# Altium PCB Chronos.PcbDoc (part 4 of 6)
Units mm, origin at the board's own origin, x right, y up, seen from the top; angles counter-clockwise.
Board outline 74.94 x 59.01 mm, 8 copper layers (TOP, L02_GND, L03_SIG, L04_PWR, L05_GND, L06_SIG, L07_GND, BOTTOM), stack 1.624 mm thick; 413 components, 238 nets, 1566 pads, 873 vias.
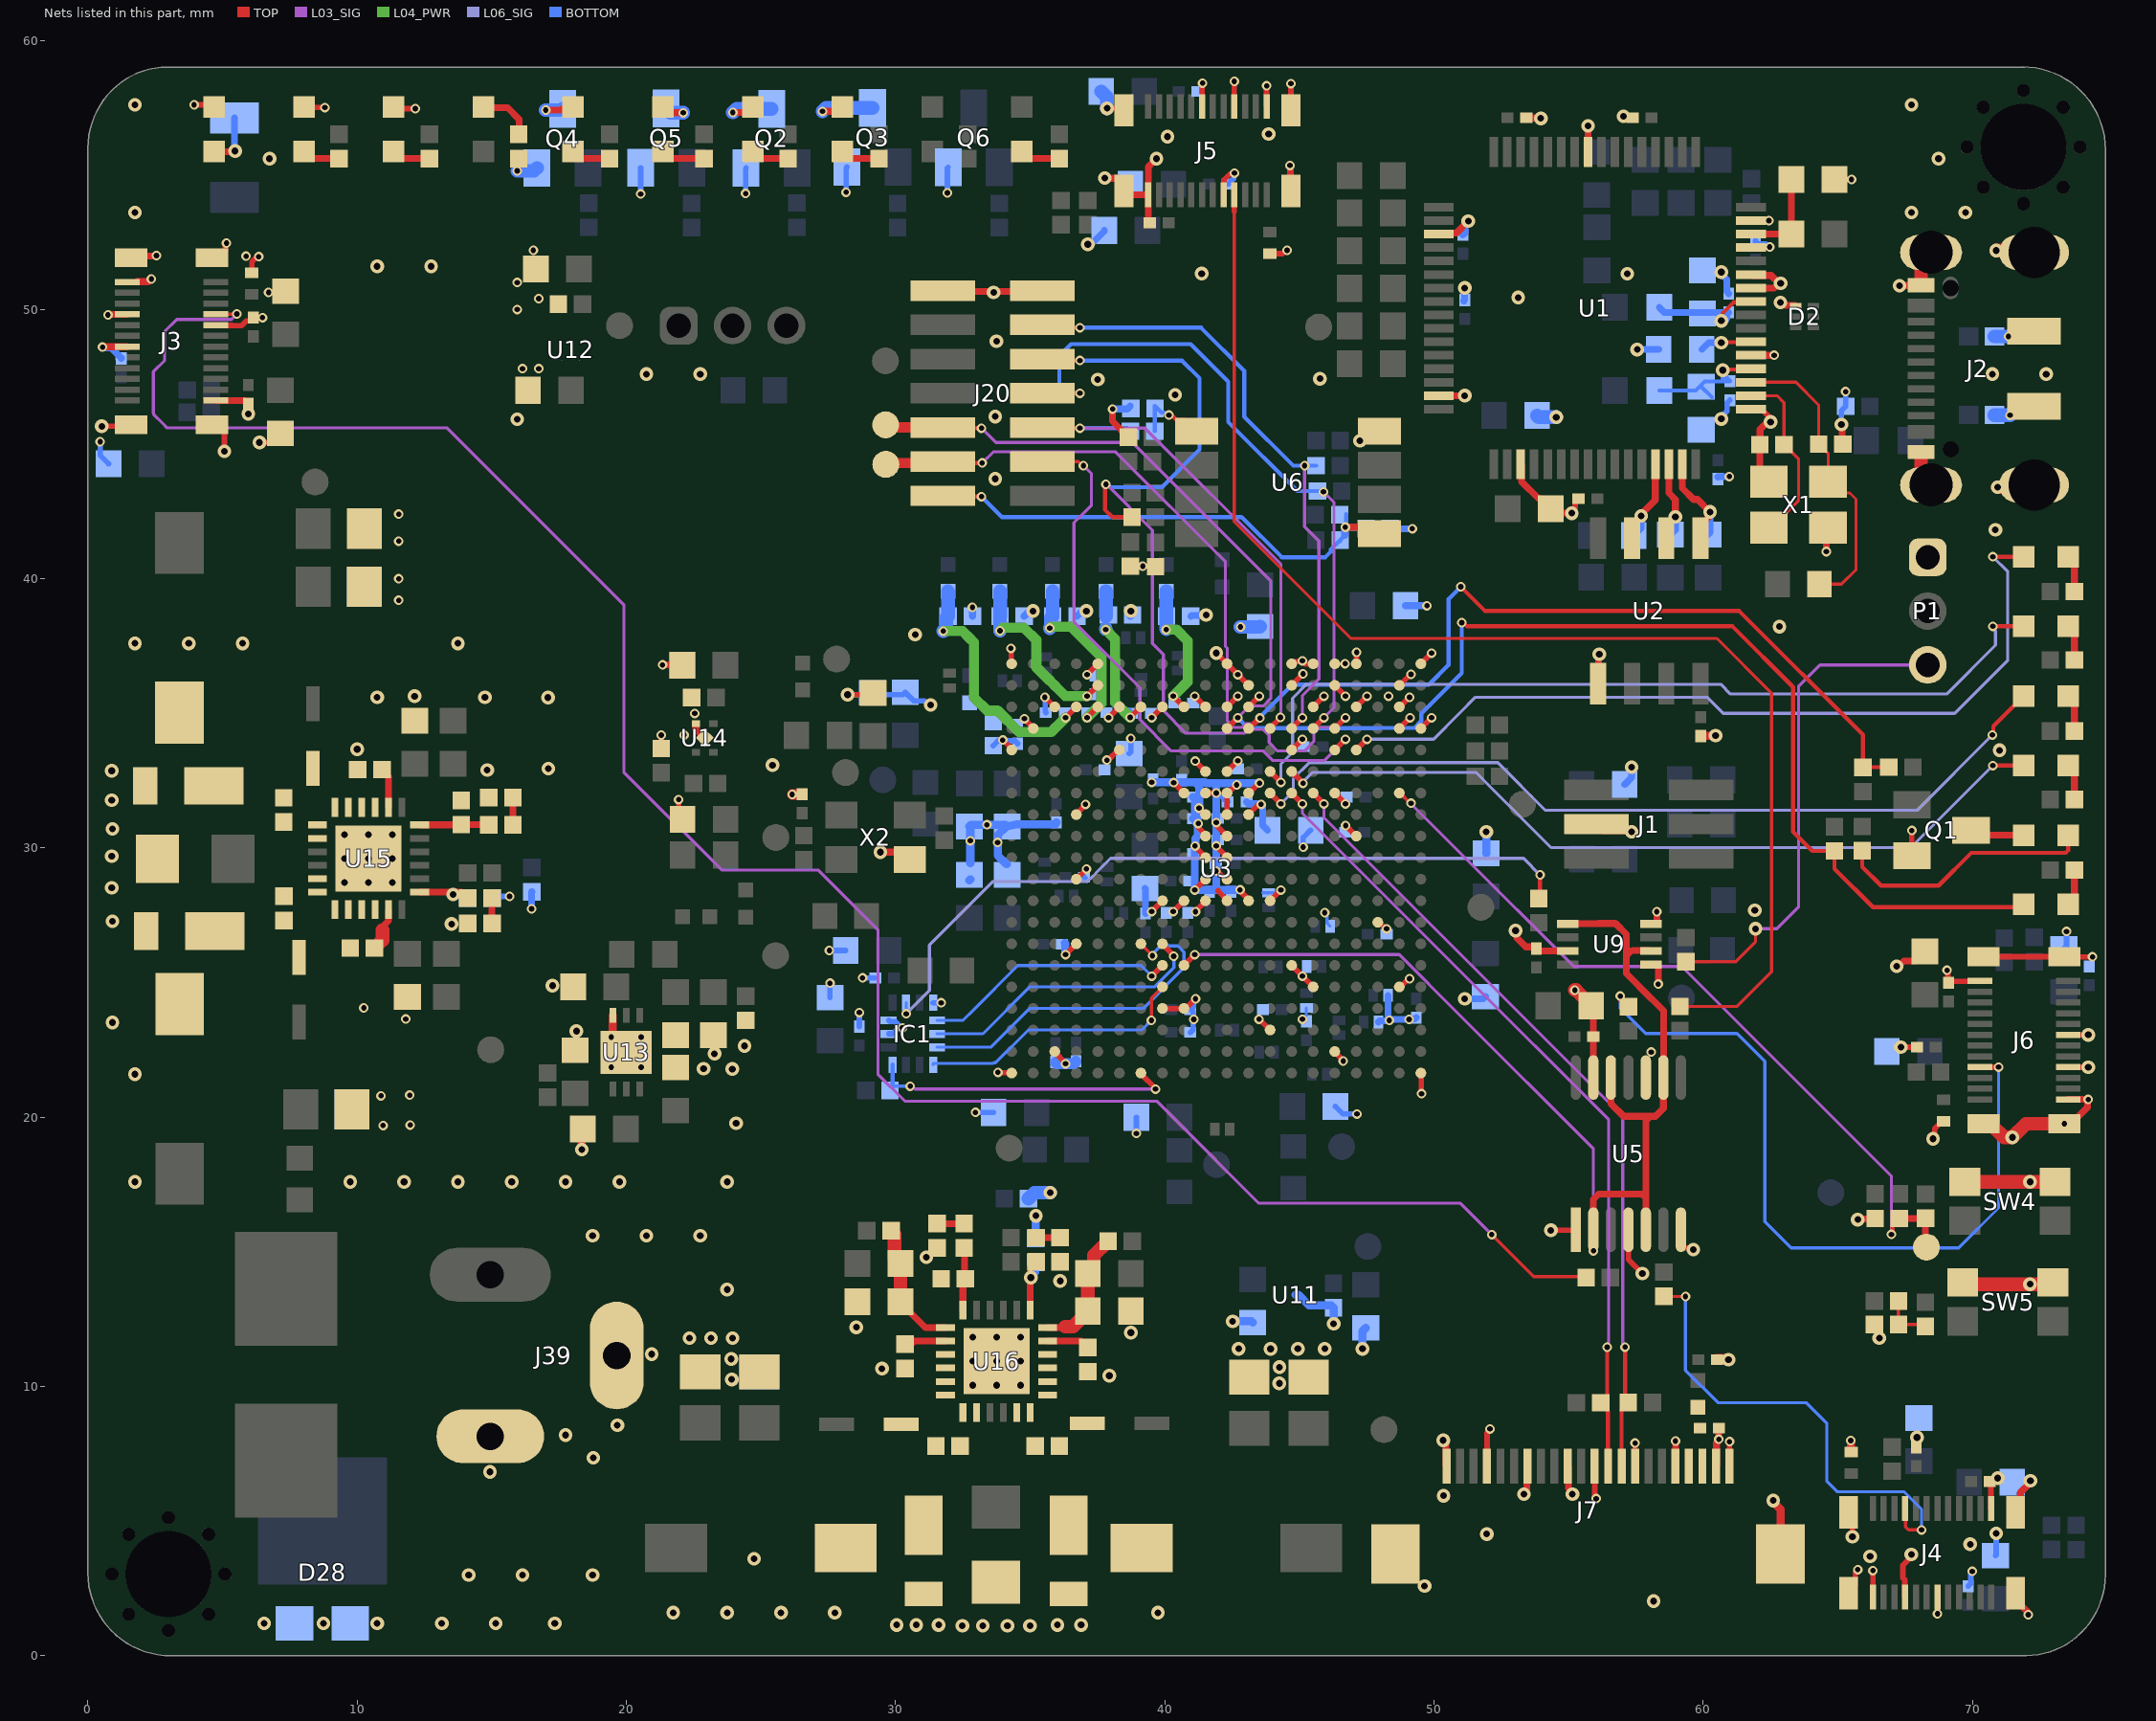
[diagram p9: the nets of this part, all layers, seen from the top]

## Via types
v1: diameter 0.356, hole 0.203, TOP to BOTTOM, tented both sides, 492 vias
v2: diameter 0.508, hole 0.254, TOP to BOTTOM, tented both sides, 380 vias
v3: diameter 0.356, hole 0.203, TOP to BOTTOM, 1 vias

## Nets (pads, with @x,y where several pads share a name; then routed paths per layer and width w, separated by ;. In a path a pad name is that pad's centre, name@x,y a point inside that pad or via, vN(x,y) a via of type N, cw(c..) or ccw(c..) an arc to the next point about the centre after c; other vN are vias at no path point) (continued)
DONE: J20.4 R82.2 R83.2 TP12.1 U3.D12 | length 52.8
  TOP w0.152: J20.4@31.75,44.348 31.8,44.298 v1(33.219,44.298) ; v1(51,39.7) 51.9,38.8 61.345,38.8 65.939,34.205 R82.2@65.939,32.992 ; R82.2@65.945,32.997 65.948,33 R83.2@66.894,33
  TOP w0.203: U3.D12@43.115,34.44 43.134,34.44 43.521,34.826 v1(43.54,34.826)
  TOP w0.381: TP12.1@29.64,44.247 29.692,44.298 31.7,44.298 J20.4@31.75,44.348
  L03_SIG w0.114: v1(33.219,44.298) 33.631,44.71 38.18,44.71 42.252,40.638 42.252,38.4 42.252,37.487 42.328,37.411 42.328,34.715 42.566,34.478 42.865,34.478 43.005,34.618 43.293,34.618 43.502,34.826 v1(43.54,34.826)
  BOTTOM w0.152: v1(43.54,34.826) 43.54,34.864 44.745,36.07 49.814,36.07 50.545,36.8 50.545,39.245 50.719,39.419 v1(51,39.7)
DQ0_MOSI: J20.5 R92.1 U3.D13 | length 19.2
  TOP w0.152: J20.5@35.45,45.618 35.475,45.593 v1(36.847,45.593)
  TOP w0.203: U3.D13@43.915,34.44 43.915,34.454 44.298,34.837 v1(44.298,34.85)
  L03_SIG w0.114: v1(36.847,45.593) 39.264,45.593 44.315,40.541 44.315,38.4 44.315,34.867 v1(44.298,34.85)
  BOTTOM w0.152: v1(36.847,45.593) 38.613,45.593 R92.1@38.729,45.477
DQ1_MISO: J20.7 R89.1 U3.D15 | length 25.8
  TOP w0.152: J20.7@35.45,46.888 v1(36.847,46.888)
  TOP w0.203: U3.D15@45.515,34.44 v1(45.915,34.84)
  L03_SIG w0.114: v1(45.893,43.231) 46.287,42.837 46.287,35.212 v1(45.915,34.84)
  BOTTOM w0.152: v1(36.847,46.888) 36.351,46.888 36.089,47.151 36.089,48.285 36.521,48.717 39.467,48.717 40.966,48.717 42.363,47.32 42.363,45.821 44.928,43.256 45.868,43.256 v1(45.893,43.231)
DQ2: J20.11 R91.2 U3.D14 | length 23.7
  TOP w0.152: J20.11@35.45,49.428 35.555,49.323 v1(36.847,49.323)
  TOP w0.203: U3.D14@44.716,34.44 v1(45.116,34.84)
  L03_SIG w0.114: v1(45.116,34.84) 45.116,35.659 45.732,36.275 45.732,41.4 45.198,41.934 v1(45.198,44.196)
  BOTTOM w0.152: v1(36.847,49.323) 39.648,49.323 41.35,49.323 42.954,47.72 42.954,46.018 44.776,44.196 v1(45.198,44.196) R91.2@45.621,44.196
DQ3: J20.9 R90.1 U3.D16 | length 33.2
  TOP w0.152: J20.9@35.45,48.158 35.506,48.102 v1(36.847,48.102) ; v1(37.817,43.508) 37.779,43.471 37.779,42.566 38.054,42.29 R90.1@38.789,42.29
  TOP w0.203: U3.D16@46.315,34.44 v1(46.715,34.84)
  L03_SIG w0.114: v1(37.817,43.508) 37.836,43.508 39.545,41.8 39.545,40.652 39.572,40.625 39.572,40.304 39.545,40.276 39.545,38.4 39.545,37.6 39.95,37.195 39.95,35.103 40.79,34.262 42.955,34.262 43.095,34.402 43.665,34.402 43.877,34.19 43.877,33.918 44.191,33.604 45.192,33.604 45.538,33.95 45.538,34.265 45.749,34.476 46.352,34.476 v1(46.715,34.84)
  BOTTOM w0.152: v1(36.847,48.102) 40.641,48.102 41.296,47.447 41.296,44.8 39.896,43.4 37.98,43.4 37.872,43.508 v1(37.817,43.508)
FLASH_CS: C79.1 J20.2 R84.1 R88.2 U6.1 | length 19.3
  TOP w0.152: J20.2@31.75,43.078 31.775,43.053 v1(33.193,43.053)
  TOP w0.254: v1(46.709,41.916) 47.739,41.916 U6.1@47.98,41.675
  BOTTOM w0.152: v1(33.193,43.053) 33.954,42.292 42.853,42.292 44.345,40.8 45.97,40.8 46.169,40.999 46.169,41.089 46.482,41.402 R88.2@46.515,41.402 ; R88.2@46.515,41.436 R88.2@46.745,41.665 ; v1@46.745,41.916 R84.1@46.745,42.4
  BOTTOM w0.254: R88.2@46.675,41.6 46.69,41.615 46.69,41.896 v1(46.709,41.916) 46.745,41.916 47.419,41.916 C79.1@47.475,41.859
FSIN0: J3.16 R58.2 | length 80.3
  TOP w0.114: J3.16@4.745,49.822 4.75,49.827 5.524,49.827 v1(5.529,49.832) ; v1(52.148,15.644) 53.707,14.084 55.616,14.084 R58.2@55.654,14.046
  L03_SIG w0.114: v1(5.529,49.832) 5.329,49.632 3.297,49.632 2.847,49.181 2.847,48.102 2.432,47.687 2.432,46.16 ccw(c2.546,46.16) 2.465,46.079 2.745,45.8 2.945,45.6 13.345,45.6 19.909,39.036 19.909,32.817 23.541,29.185 27.123,29.185 29.345,26.963 29.345,21.6 30.345,20.6 39.702,20.6 40.302,20 43.496,16.806 50.985,16.806 v1(52.148,15.644)
FSIN1: J4.16 R59.2 | length 17.8
  TOP w0.114: R59.2@58.545,13.35 58.549,13.345 v1(59.344,13.345) ; J4.16@67.509,5.464 67.523,5.45 67.523,4.784 67.631,4.676 v1(68.116,4.676)
  BOTTOM w0.114: v1(59.344,13.345) 59.344,10.601 60.545,9.4 63.825,9.4 64.6,8.624 64.6,6.475 64.979,6.096 66.696,6.096 67.458,6.096 68.116,5.438 v1(68.116,4.676)
FSIN2: J5.16 R60.2 | length 49
  TOP w0.114: 42.585,53.634 42.585,42.119 46.304,38.4 46.922,37.783 50.945,37.783 60.51,37.783 62.545,35.749 62.545,25.4 61.261,24.117 R60.2@59.138,24.117
  TOP w0.203: 42.585,53.634 J5.16@42.585,54.261
FSIN3: J6.16 R61.2 | length 28.7
  TOP w0.203: J6.16@70.281,21.861 v1@70.977,21.861
  TOP w0.254: v1(56.921,24.499) 56.941,24.48 56.941,24.399 R61.2@57.232,24.108
  BOTTOM w0.114: v1(56.921,24.499) 56.921,24.049 57.862,23.109 61.258,23.109 62.291,22.075 62.291,16.126 63.272,15.146 69.491,15.146 70.977,16.633 70.977,19.534 70.971,19.54 70.971,19.924 70.977,19.93 v1(70.977,21.861)
FSIN_EXT: P1.3 R63.2 | length 18.6
  TOP w0.114: R63.2@59.357,25.773 61.207,25.773 61.945,26.511 v2(61.945,27)
  L03_SIG w0.114: v2(61.945,27) 62.745,27 63.545,27.8 63.545,36 64.345,36.8 P1.3@68.345,36.8
FSIN_FPGA: U3.R9 U5.2 U5.5 U5.9 U5.12 U9.2 U9.5 | length 43.2
  TOP w0.203: U3.R9@40.716,25.64 v1(41.116,26.04)
  TOP w0.254: U9.5@54.962,27.177 54.974,27.188 56.113,27.188 56.124,27.2 56.745,27.2 57.149,26.795 57.149,25.999 ; U5.2@55.923,15.821 55.923,16.95 56.122,17.149 57.725,17.149 57.873,17 ; U5.12@56.573,21.472 56.573,20.508 57.047,20.035 58.039,20.035 ; 57.327,26.177 57.149,25.999 ; 57.383,26.2 58.039,26.2 U9.2@58.062,26.177 ; U5.5@57.873,15.821 57.873,17 ; 57.149,25.999 57.145,25.994 57.145,25.338 58.082,24.4 58.093,24.4 58.534,23.959 58.534,22.776 58.535,22.774 58.535,21.484 U5.9@58.523,21.472 58.523,20.329 58.229,20.035 58.039,20.035 ; 57.873,17 57.873,19.869 58.039,20.035
  L03_SIG w0.114: v1(41.116,26.04) 48.71,26.04 50.945,23.805 55.926,18.824 v1(55.926,15.037)
FSIN_IMU: IC1.9 R62.2 | length 28.5
  TOP w0.152: R62.2@53.896,28.121 53.945,28.17 v1(53.945,29)
  L06_SIG w0.114: v1(30.395,23.842) 31.263,24.711 31.263,26.393 33.625,28.756 34.5,28.756 35.456,28.756 37.127,28.756 37.234,28.862 37.243,28.862 37.455,29.075 37.455,29.084 37.988,29.616 45,29.616 45.007,29.61 45.307,29.61 45.313,29.616 50.945,29.616 53.328,29.616 v1(53.945,29)
  BOTTOM w0.114: v1(30.395,23.842) IC1.9@30.395,24.25
FT_EECLK: R11.2 U1.62 U2.2 | length 3.7
  TOP w0.152: U2.2@58.633,41.506 58.633,41.961 v2(58.97,42.297)
  TOP w0.254: U1.62@58.726,44.249 58.726,43.184 58.97,42.94 v2(58.97,42.297)
  BOTTOM w0.254: R11.2@58.786,41.638 58.97,41.823 v2(58.97,42.297)
FT_EECS: R10.2 U1.63 U2.1 | length 4.3
  TOP w0.254: U1.63@59.226,44.249 59.226,43.366 59.644,42.947 59.791,42.947 v2(60.258,42.48) 60.21,42.432 60.21,42.287 59.903,41.981 U2.1@59.903,41.506
  BOTTOM w0.254: R10.2@60.183,41.638 60.258,41.714 v2(60.258,42.48)
FT_EEDATA: R16.1 U1.61 U2.3 | length 3.9
  TOP w0.254: U2.3@57.363,41.506 57.363,41.981 57.702,42.32 57.702,42.396 58.226,42.919 U1.61@58.226,44.249
  BOTTOM w0.254: R16.1@57.427,41.6 57.702,41.876 v2(57.702,42.333)
FT_OSCI: C16.2 U1.2 X1.1 | length 6.7
  TOP w0.114: U1.2@61.776,46.799 62.746,46.799 63.004,46.54 C16.2@63.004,44.982 63.375,44.611 63.549,44.437 63.549,44.181 63.545,44.177 63.545,42.9 62.545,41.9 X1.1@62.445,41.9
FT_OSCO: C17.2 JP2.1 U1.3 X1.3 | length 11.4
  TOP w0.114: U1.3@61.776,47.299 63.446,47.299 64.294,46.45 C17.2@64.294,45 64.645,44.65 X1.3@64.645,43.6 65.059,43.185 65.449,43.185 65.678,42.956 65.678,40.334 65.145,39.8 JP2.1@64.32,39.8
FT_REF: R13.2 U1.6 | length 1.9
  TOP w0.152: v2(60.675,48.767) 60.691,48.783 61.76,48.783 U1.6@61.776,48.799
  BOTTOM w0.254: R13.2@59.952,48.514 60.205,48.767 v2(60.675,48.767)
FT_RSTB: JP1.1 R9.1 U1.14 | length 3.6
  TOP w0.254: U1.14@61.776,52.799 63.272,52.799 R9.1@63.279,52.807 JP1.1@63.279,54.829 JP1.1@63.372,54.829
FT_VPHY: C9.1 C10.2 L3.1 U1.4 | length 5.3
  TOP w0.152: v2(60.731,47.744) 60.758,47.771 61.748,47.771 U1.4@61.776,47.799
  BOTTOM w0.152: L3.1@58.372,46.987 59.722,46.987 59.901,47.167 60.066,47.332 60.731,47.332 ; C10.2@59.932,47.136 C10.2@60.33,46.737 ; 60.731,47.332 60.731,47.55 60.731,47.676 v2(60.731,47.744) 60.799,47.676 60.799,47.55 60.992,47.357 C9.1@60.992,47.332 60.731,47.332
FT_VPLL: C6.2 C7.1 L1.1 U1.9 | length 4.7
  TOP w0.152: v2(60.675,49.581) 60.723,49.63 60.723,49.856 61.133,50.265 61.742,50.265 U1.9@61.776,50.299
  BOTTOM w0.254: L1.1@58.372,50.077 58.558,49.891 59.977,49.891 C7.1@60.955,49.891 60.882,49.818 60.882,49.654 60.858,49.63 60.723,49.63 v2(60.675,49.581)
GND: C1.2 C2.2 C3.2 C4.2 C5.1 C6.1 C7.2 C8.2 C9.2 C10.1 C11.2 C12.2 C13.2 C14.1 C15.2 C16.1 C17.1 C18.2 C19.2 C20.2 C21.2 C22.2 C23.2 C24.2 C25.2 C26.2 C27.2 C28.2 C29.2 C30.2 C31.2 C32.2 C33.2 C34.2 C35.2 C36.2 C37.2 C38.2 C39.2 C40.2 C41.2 C42.2 C44.2 C45.2 C46.2 C47.2 C48.2 C49.2 C52.2 C53.2 C54.2 C55.2 C56.2 C57.2 C58.2 C59.2 C60.2 C63.2 C64.2 C65.2 C66.2 C67.2 C68.2 C69.2 C70.2 C71.2 C72.2 C73.2 C74.2 C75.2 C76.2 C77.2 C78.2 C79.2 C80.2 C81.2 C91.2 C92.2 C93.2 C94.2 C95.2 C96.2 C97.2 C98.2 C99.2 C100.2 C101.2 C102.2 C103.2 C104.2 C105.2 C106.2 C107.2 C108.2 C109.2 C110.2 C111.2 C112.2 C113.2 C114.2 C115.2 C116.2 C117.2 C118.2 C119.2 C120.2 C121.1 C122.1 C123.1 C124.2 C125.1 C126.2 C127.2 C128.2 C129.2 C130.2 C131.2 C132.2 C133.1 C134.1 C135.2 C136.2 C137.2 C138.2 C139.2 C140.2 C141.2 C144.1 C145.2 C147.2 C148.2 C150.2 C151.2 C152.2 C153.2 C154.2 C155.2 C158.1 C159.2 C161.2 C162.2 C165.2 C166.2 C168.2 C169.2 C170.2 C171.2 D2.1 D19.1 D20.1 D21.1 D28.1 D28.2 D31.2 D32.2 D35.2 D36.2 FB2.2 FB3.2 FB9.2 FB10.2 IC1.6 IC1.7 IC1.11 J1.4 J2.1 J2.2 J2.3 J2.4 J2.5 J2.6 J2.A1/B12 J2.A12/B1 J3.6 J3.9 J3.12 J3.17 J3.24 J3.25 J3.26 J3.27 J3.28 J4.6 J4.9 J4.12 J4.24 J4.25 J4.26 J4.27 J4.28 J5.6 J5.9 J5.12 J5.17 J5.24 J5.25 J5.26 J5.27 J5.28 J6.6 J6.9 J6.12 J6.24 J6.25 J6.26 J6.27 J6.28 J7.1 J7.4 J7.7 J7.10 J7.12 J7.15 J7.18 J7.21 J7.22 J7.MP1 J7.MP2 J20.13 J20.14 J39.2 J39.3 JP1.2 P1.1 Q1.2 Q2.2 Q3.2 Q4.2 Q5.2 Q6.2 R4.2 R13.1 R55.2 R56.2 R64.2 R65.2 R66.2 R67.2 R68.2 R70.2 R116.2 R120.2 R121.1 R141.2 R144.2 R145.2 R146.2 R147.2 R148.1 R156.2 R157.2 R158.2 R159.2 R160.2 R166.2 R167.2 R168.2 R169.2 R170.2 SW4.2 SW4.4 SW5.2 SW5.4 U1.1 U1.5 U1.10 U1.11 U1.13 U1.15 U1.25 U1.35 U1.47 U1.51 U2.5 U3.A1 U3.A5 U3.A11 U3.A14 U3.A15 U3.A16 U3.A17 U3.A20 U3.B12 U3.B14 U3.B16 U3.B19 U3.C3 U3.C6 U3.C8 U3.C10 U3.C11 U3.C12 U3.C15 U3.C17 U3.C19 U3.D19 U3.D20 U3.E1 U3.E6 U3.E14 U3.F10 U3.F11 U3.G9 U3.G10 U3.G11 U3.G12 U3.G16 U3.H4 U3.H10 U3.H11 U3.J10 U3.J11 U3.J17 U3.K10 U3.K11 U3.L4 U3.L10 U3.L11 U3.M8 U3.M9 U3.M10 U3.M11 U3.M12 U3.M13 U3.N18 U3.P4 U3.R14 U3.T15 U3.T19 U3.U8 U3.U9 U3.V13 U3.W3 U3.W16 U3.Y1 U3.Y20 U5.1 U5.4 U5.7 U5.10 U5.13 U6.4 U9.1 U9.4 U9.7 U11.2 U11.5 U12.2 U12.5 U13.3 U13.7 U14.2 U14.5 U15.3 U15.4 U15.5 U15.6 U15.13 U15.14 U15.15 U15.16 U15.25 U16.3 U16.4 U16.5 U16.6 U16.13 U16.14 U16.15 U16.16 U16.25 X1.2 X1.4 X2.2 | length 238.5
  TOP w0.114: v1@45.201,36.87 45.485,36.87 U3.A15@45.515,36.84 ; U3.A16@46.315,36.84 46.318,36.843 46.7,36.843 v1(46.702,36.846)
  TOP w0.203: v2(0.513,45.661) 1.544,45.661 J3.27@1.605,45.722 ; v1(3.945,57.6) 4.608,57.6 D19.1@4.693,57.515 ; J3.25@4.605,45.722 4.817,45.722 5.066,45.474 v2(5.066,44.73) ; J3.26@4.605,51.922 4.855,51.922 5.104,52.171 5.104,52.379 5.145,52.42 v1(5.145,52.462) ; J3.17@4.745,49.422 4.759,49.409 5.342,49.409 5.351,49.4 5.708,49.4 5.885,49.577 6.046,49.577 6.145,49.675 C40.2@6.145,49.7 6.146,49.698 v1(6.486,49.696) v1(6.486,49.696) ; FB2.2@6.086,51.361 6.089,51.364 6.089,51.773 6.25,51.933 6.311,51.933 v1(6.34,51.962) ; v2(6.371,45.06) 6.815,45.06 C37.2@7.151,45.396 ; v1(6.71,50.631) 7.296,50.631 C39.2@7.342,50.677 ; D20.1@8.026,57.515 8.038,57.504 v1(8.805,57.504) ; D21.1@11.359,57.515 11.417,57.458 v1(12.158,57.458) ; R145.2@21.296,33.695 v1(21.296,34.195) ; v1(21.945,31.8) 21.945,31.207 C135.2@22.087,31.065 ; v2@28.254,35.699 29.109,35.699 C122.1@29.169,35.759 ; v1(33.803,21.666) 33.816,21.653 34.302,21.653 U3.Y1@34.315,21.64 ; v1@33.989,34.019 34.315,33.693 U3.E1@34.315,33.64 ; v1(34.285,37.414) 34.3,37.399 34.3,36.855 U3.A1@34.315,36.84 ; v1(35.545,35.6) 35.55,35.6 35.91,35.24 U3.C3@35.915,35.24 ; U3.W3@35.915,22.44 35.915,22.416 36.32,22.011 v1(36.32,21.987) ; v1(36.315,26.04) U3.P4@36.716,26.44 ; U3.L4@36.716,28.84 36.716,28.843 37.093,29.221 v1(37.093,29.224) ; U3.H4@36.716,31.24 36.716,31.285 36.738,31.285 37.054,31.601 v1(37.054,31.623) ; v1(37.115,36.44) U3.A5@37.515,36.84 ; v1(37.851,33.262) 37.892,33.262 38.27,33.64 U3.E6@38.316,33.64 ; v2(37.858,57.472) 38.414,57.472 J5.27@38.485,57.401 ; v1(37.915,34.84) U3.C6@38.316,35.24 ; v1(39.515,27.64) U3.M8@39.915,28.04 ; v1(39.515,34.84) U3.C8@39.915,35.24 ; U3.U8@39.915,24.04 39.922,24.034 40.709,24.034 U3.U9@40.716,24.04 40.785,24.04 v1(41.145,24.4) ; v1(40.315,27.64) U3.M9@40.716,28.04 ; v1(40.335,32.429) 40.335,32.425 40.716,32.044 U3.G9@40.716,32.04 ; v1(41.115,28.44) U3.L10@41.515,28.84 ; v1(41.115,35.64) U3.C10@41.515,35.24 ; v1(41.127,30.074) 41.127,30.051 41.515,29.663 U3.K10@41.515,29.64 ; v1(41.131,33.228) 41.131,33.226 41.515,32.842 U3.F10@41.515,32.84 ; v1(41.143,27.635) 41.143,27.652 41.515,28.024 U3.M10@41.515,28.04 ; v1(41.245,30.912) 41.274,30.883 41.274,30.734 41.515,30.493 U3.J10@41.515,30.44 ; v1(41.278,31.482) v1(41.278,31.482) 41.515,31.242 U3.H10@41.515,31.24 ; J5.6@41.385,57.541 41.394,57.551 41.394,58.401 v1(41.404,58.41) ; U3.G10@41.516,32.039 v1@41.914,32.039 ; v1(41.897,29.141) 41.926,29.112 41.99,29.112 42.262,28.84 U3.L11@42.315,28.84 ; v1(41.913,30.079) 41.913,30.061 42.315,29.659 U3.K11@42.315,29.64 ; v1(41.914,30.948) 41.943,30.919 41.943,30.812 U3.J11@42.315,30.44 ; v2(41.915,37.24) U3.A11@42.315,36.84 v1(42.715,36.44) U3.B12@43.115,36.04 ; 41.987,28.419 41.987,28.394 42.315,28.065 U3.M11@42.315,28.04 ; J5.17@42.185,54.261 42.198,54.274 42.198,54.809 v1@42.428,55.038 ; U3.H11@42.31,31.245 U3.G11@42.31,32.035 ; U3.G11@42.315,32.04 42.35,32.04 42.654,32.343 v1(42.673,32.343) ; U3.F11@42.315,32.84 v1(42.715,33.24) ; U3.C11@42.315,35.24 v1(42.715,35.64) ; J5.9@42.585,57.541 v1(42.585,58.475) ; v1(42.796,28.445) 42.796,28.404 43.115,28.085 U3.M12@43.115,28.04 ; U3.G12@43.115,32.04 43.133,32.04 43.504,32.411 v1(43.522,32.411) ; U3.C12@43.115,35.24 v1(43.515,35.64) ; v1@43.515,23.64 U3.V13@43.915,23.24 ; J5.12@43.785,57.81 J5.12@43.785,57.541 J5.12@43.785,57.81 ; v1(43.785,58.306) J5.12@43.785,57.81 ; J5.12@43.798,57.823 J5.12@43.785,57.81 ; FB9.2@43.912,52.072 43.917,52.076 44.38,52.076 44.503,52.2 v1(44.545,52.2) ; U3.M13@43.915,28.04 v1(44.315,28.44) ; v1@44.633,58.389 v1(44.685,58.389) J5.28@44.685,57.401 ; U3.R14@44.716,25.64 v1(45.115,25.24) U3.T15@45.515,24.84 ; U3.E14@44.716,33.64 v1(45.116,34.04) ; U3.B14@44.716,36.04 v1@45.139,36.465 ; U3.A14@44.716,36.84 44.769,36.84 44.852,36.924 45.089,36.924 v1(45.118,36.953) v1@45.201,36.87 ; v1@45.231,36.84 U3.A15@45.492,36.84 ; U3.C15@45.515,35.24 v1(45.915,35.64) ; U3.W16@46.315,22.44 46.315,22.424 46.634,22.105 v1(46.634,22.088) ; U3.G16@46.315,32.04 v1(46.715,31.64) ; U3.B16@46.315,36.04 v1(46.715,35.64) ; v1(46.723,30.833) U3.J17@47.115,30.44 ; U3.C17@47.115,35.24 v1(47.515,35.64) ; U3.A17@47.115,36.84 47.122,36.846 47.122,37.26 v1(47.128,37.266) ; U3.N18@47.915,27.24 47.963,27.24 48.203,27 v1(48.245,27) ; U3.T19@48.715,24.84 48.753,24.84 49.057,25.144 v1(49.094,25.144) ; U3.D19@48.715,34.44 v1(49.116,34.84) ; U3.C19@48.715,35.24 48.729,35.24 49.084,35.596 v1(49.098,35.596) ; U3.B19@48.715,36.04 48.725,36.04 49.136,36.451 v1(49.146,36.451) ; U3.Y20@49.515,21.64 49.529,21.626 49.529,20.885 v1(49.543,20.871) ; U3.D20@49.515,34.44 v1(49.915,34.84) ; U3.A20@49.515,36.84 v1(49.915,37.24) ; J7.4@51.973,7.035 51.973,8.276 52.081,8.384 v1(52.081,8.426) ; v2(54.345,15.8) 55.253,15.8 U5.1@55.273,15.821 ; v2(55.121,42.435) 55.121,42.517 55.249,42.646 55.249,42.878 55.348,42.977 C1.2@55.373,42.977 ; J7.12@55.973,7.035 55.973,5.93 56.027,5.876 v1(56.027,5.835) ; U5.4@57.223,15.821 57.223,14.721 v2(57.745,14.2) ; J7.15@57.473,7.035 v1(57.473,7.897) ; U5.7@59.173,15.821 59.173,15.232 59.255,15.15 59.49,15.15 59.552,15.088 v2(59.635,15.088) ; J7.22@60.977,7.036 60.979,7.038 60.979,7.948 v1(60.981,7.95) ; U1.1@61.776,46.299 62.169,46.299 62.446,46.022 62.446,45.88 v2(62.505,45.822) ; U1.15@61.776,53.299 v1(62.446,53.299) ; JP1.2@64.88,54.829 v1(65.515,54.829) ; J4.28@65.409,2.324 65.657,2.572 65.657,3.113 v1(65.745,3.2) ; J4.26@65.409,5.324 65.548,5.185 v2(65.548,4.423) ; J4.12@66.309,2.184 v1(66.309,3.164) ; v2(67.345,22.6) C104.2@67.945,22.6 ; J4.9@67.509,2.184 67.496,2.197 67.496,2.822 67.423,2.895 67.423,3.363 67.737,3.677 v2(67.737,3.759) ; v1(67.752,30.649) 67.752,29.714 Q1.2@67.758,29.708 ; v2(68.545,19.2) 68.601,19.257 68.601,19.577 68.875,19.851 FB10.2@68.925,19.851 ; v1(68.709,1.557) J4.6@68.709,2.184 ; v1(69.062,25.457) 69.091,25.429 69.091,25.029 C102.2@69.119,25 69.166,25.047 70.267,25.047 J6.24@70.281,25.06 ; J6.25@70.421,25.96 J6.27@73.421,25.96 J6.27@73.421,25.96 v1(74.468,25.959) ; C18.2@70.653,6.477 C18.2@70.665,6.464 ; J4.24@70.709,5.464 70.696,5.477 70.696,6.434 C18.2@70.665,6.464 ; v2(70.945,6.6) 70.886,6.542 70.743,6.542 C18.2@70.665,6.464 ; J6.9@73.561,21.86 v2(74.31,21.86) 74.345,21.826 v2@74.345,21.8 ; J6.6@73.561,23.06 v2(74.31,23.06)
  TOP w0.254: v1(0.545,48.6) 0.561,48.617 1.46,48.617 J3.6@1.465,48.622 ; v1(0.745,49.8) 0.761,49.817 1.46,49.817 J3.9@1.465,49.822 ; J3.28@1.605,51.922 1.664,51.981 2.525,51.981 v1(2.545,52) ; J3.12@1.811,51.034 2.234,51.034 2.33,51.13 v1(2.358,51.13) ; J3.24@4.745,46.622 5.851,46.622 5.956,46.517 C38.2@5.956,46.492 ; v1(15.945,55.146) 15.964,55.166 15.964,55.571 R121.1@15.997,55.605 ; v1(21.345,36.8) 22.063,36.8 C137.2@22.078,36.785 ; U14.2@22.587,34.518 22.587,34.413 U14.5@22.913,34.088 ; v2(29.437,29.849) 30.058,29.849 30.155,29.946 X2.2@30.528,29.573 ; J20.14@31.75,50.698 31.781,50.667 33.614,50.667 v2(33.646,50.635) 33.678,50.667 35.418,50.667 J20.13@35.45,50.698 ; v2(37.771,54.879) 37.775,54.874 38.262,54.874 38.485,54.651 J5.25@38.485,54.401 38.625,54.261 J5.24@39.385,54.261 ; v1(38.062,46.302) 38.062,45.851 C81.2@38.654,45.26 ; C77.2@38.728,40.464 v1(39.185,40.464) v1@39.191,40.458 ; C45.2@39.436,53.211 C45.2@39.446,53.221 39.391,53.277 39.391,54.255 J5.24@39.385,54.261 ; v2(39.696,55.601) 39.385,55.29 J5.24@39.385,54.261 ; v1(44.654,55.352) 44.669,55.336 44.669,54.417 J5.26@44.685,54.401 ; v2(47.252,45.121) 47.617,45.121 U6.4@47.98,45.485 ; U1.47@50.176,46.799 v2(51.145,46.8) ; U1.35@50.176,52.799 50.209,52.832 50.827,52.832 v2@51.276,53.281 ; v2(50.345,8) 50.345,7.931 50.45,7.826 50.45,7.058 J7.1@50.473,7.035 ; v2(53.034,26.932) 53.083,26.884 53.083,26.662 53.417,26.328 53.747,26.328 C99.2@53.81,26.265 ; U1.51@53.226,44.249 53.259,44.215 53.259,43.606 53.896,42.969 53.991,42.969 54.339,42.621 C5.1@54.339,42.596 54.5,42.435 v2(55.121,42.435) ; v2(53.345,6) 53.345,6.069 53.45,6.174 53.45,7.012 J7.7@53.473,7.035 ; C4.2@53.431,57.125 53.444,57.112 53.958,57.112 v2(53.97,57.099) ; C99.2@53.948,26.181 54.958,26.181 U9.7@54.962,26.177 ; J7.10@54.973,7.035 54.996,7.012 54.996,6.217 55.145,6.069 v2(55.145,6) ; v2(55.723,56.82) 55.724,56.818 U1.25@55.726,55.849 U1.25@55.726,55.849 ; C98.2@55.839,24.141 55.923,24.056 U5.13@55.923,21.472 ; J1.4@56.034,30.886 56.271,30.649 57.296,30.649 v2(57.345,30.6) v2@57.38,30.6 ; U2.5@56.093,36.106 56.119,36.132 56.119,37.174 v2(56.145,37.2) ; v2(57.04,57.175) 57.068,57.148 57.352,57.148 C3.2@57.379,57.121 ; U9.1@58.062,25.677 58.311,25.677 58.334,25.654 v1(58.334,24.944) ; U9.4@58.062,27.177 58.258,27.177 58.281,27.2 v1(58.281,27.636) ; v1@58.945,8 v1(58.973,7.972) J7.18@58.973,7.035 ; J7.21@60.473,7.035 60.496,7.058 60.496,7.924 60.585,8.012 v1(60.585,8.04) C73.2@60.585,8.457 ; U1.5@61.776,48.299 v1(62.643,48.299) ; U1.10@61.776,50.799 62.638,50.799 62.812,50.974 v2@62.818,50.974 ; U1.11@61.776,51.299 61.809,51.265 62.527,51.265 v2@62.818,50.974 ; 62.263,45.704 62.114,45.555 62.114,44.991 C16.1@62.104,44.982 62.104,43.94 X1.4@62.445,43.6 ; v2(62.87,50.261) 62.939,50.261 63.05,50.15 D2.1@63.428,50.15 ; v2(62.881,50.974) v2@62.818,50.974 ; v1(64.578,41.009) 64.578,41.833 X1.2@64.645,41.9 ; v2(65.136,45.728) 65.165,45.698 65.165,45.029 C17.1@65.195,45 ; v2(65.745,16.2) 65.763,16.219 66.371,16.219 C63.2@66.39,16.238 ; C76.2@66.361,12.301 66.496,12.166 66.496,11.849 v2(66.545,11.8) ; v2(67.192,25.609) 67.261,25.609 67.459,25.807 67.893,25.807 C101.2@68.241,26.155 ; v2(67.296,50.883) 67.304,50.891 68.086,50.891 J2.A12/B1@68.095,50.9 ; C19.2@67.915,7.741 67.93,7.756 67.93,8.093 v2(67.945,8.108) v2@67.945,8 ; J4.27@71.609,2.324 71.609,2.074 72.061,1.622 72.061,1.543 v1(72.081,1.524) ; J4.25@71.609,5.324 71.785,5.5 71.785,6.062 72.157,6.434 v2(72.157,6.502) ; v1(73.421,19.76) 73.671,19.76 74.286,20.375 74.286,20.642 74.304,20.661 J6.12@73.561,20.66
  TOP w0.305: v2(18.345,18.8) 18.345,19.522 R147.2@18.381,19.559 ; v1(19.436,22.975) 19.494,23.034 U13.3@19.494,23.791 ; C15.2@59.912,34.16 59.919,34.167 60.456,34.167 v2(60.463,34.175) ; v2(62.606,5.766) 62.606,5.711 62.873,5.444 J7.MP2@62.873,3.785 ; v1(65.487,7.991) 65.494,7.983 65.494,7.573 FB3.2@65.502,7.565
  TOP w0.381: v1(26.161,31.991) 26.531,31.991 C20.2@26.536,31.996
  TOP w0.406: C97.2@60.52,11 v2(60.945,11)
  TOP w0.508: v1(55.234,24.723) 55.282,24.723 55.839,24.166 C98.2@55.839,24.141 ; J2.A1/B12@68.095,44.7 68.095,43.855 J2.1@68.47,43.48 ; J2.A12/B1@68.095,50.9 68.095,51.745 J2.2@68.47,52.12 ; SW5.4@69.645,13.868 69.714,13.8 v2(72.145,13.8) 72.927,13.8 SW5.2@72.995,13.868 ; SW4.4@69.721,17.602 69.724,17.6 v2(72.145,17.6) 73.069,17.6 SW4.2@73.071,17.602 ; J6.26@70.421,19.76 70.517,19.664 70.767,19.664 71.179,19.251 v2(71.486,19.251) 71.995,19.76 v1(73.421,19.76) ; v2(70.89,52.19) J2.6@72.688,52.19 ; v2(70.941,43.4) 72.745,43.4 J2.3@72.787,43.358
  BOTTOM w0.114: R64.2@43.639,28.335 44.21,28.335 v1(44.315,28.44) ; v1(45.116,23.64) 45.258,23.783 R67.2@45.258,24.063 ; v1(45.945,27.6) 45.945,27.535 46.028,27.451 46.028,27.214 R65.2@46.146,27.096
  BOTTOM w0.203: v1(0.453,45.085) 0.453,44.59 C41.2@0.77,44.272 ; C148.2@15.011,28.137 15.074,28.2 v1(15.666,28.2) ; Q5.2@20.53,55.266 20.532,55.265 v1(20.532,54.291) ; v1(24.43,54.305) 24.43,55.238 Q2.2@24.448,55.255 ; v1@27.545,25 v1(27.566,24.979) C71.2@27.566,24.443 ; v1(27.544,26.194) C69.2@28.144,26.194 ; v1(28.164,54.356) 28.164,55.257 Q3.2@28.196,55.289 ; v2(28.221,35.697) C123.1@30.24,35.697 ; C72.2@28.655,23.367 v1(28.655,23.89) ; v1(28.771,25.173) C70.2@29.246,25.173 ; C121.1@29.179,35.699 C123.1@30.273,35.699 ; IC1.6@29.745,23.1 29.895,23.1 v1@30.087,23.293 ; IC1.7@29.745,23.6 29.793,23.552 29.98,23.552 30.209,23.322 v1(30.25,23.322) ; C123.1@30.356,35.782 30.677,35.461 31.072,35.461 31.224,35.309 v2(31.306,35.309) ; IC1.11@31.395,24.25 v1(31.695,24.25) v1@31.745,24.2 ; v1(31.923,54.331) 31.923,55.246 Q6.2@31.955,55.278 ; v1(32.967,20.178) C91.2@33.643,20.178 ; C28.2@33.63,33.804 33.837,34.011 v1(33.981,34.011) 34.01,33.981 34.444,33.981 34.542,33.883 C27.2@34.542,33.871 ; v1(35.545,35.6) 35.564,35.58 35.564,35.05 C35.2@35.584,35.03 ; C55.2@37.006,28.914 C55.2@37.116,28.805 ; v2(37.771,54.879) 38.499,54.879 C46.2@38.722,54.656 ; C133.1@38.68,33.508 38.738,33.566 v1(38.738,34.065) ; v1(38.944,19.4) C94.2@38.944,20 ; C95.2@40.944,23.151 40.954,23.151 41.052,23.249 41.052,23.607 v1(41.082,23.636) 41.052,23.665 41.052,23.917 40.97,24 41.068,24.098 41.068,24.282 41.145,24.359 v1(41.145,24.4) ; v1(41.914,32.039) 41.944,32.009 42.018,32.009 42.313,31.714 C124.2@42.338,31.714 ; C47.2@42.339,54.661 42.364,54.661 42.562,54.859 42.562,55.038 v1(42.591,55.067) ; v1(45.145,30.033) 45.145,30.386 C125.1@45.421,30.662 ; C108.2@46.345,20.4 46.625,20.119 v1(47.138,20.119) ; v2(60.675,45.936) 60.675,46.019 60.894,46.238 60.894,46.533 C9.2@60.992,46.632 ; C12.2@61.945,52.55 61.945,52.525 62.043,52.427 62.332,52.427 62.433,52.326 v1(62.474,52.326) ; v2(65.136,45.728) 65.136,46.241 C8.2@65.294,46.4 v1(65.294,46.95) v1@65.345,47 ; C24.2@69.845,2.585 69.944,2.684 69.944,3.042 69.996,3.094 v1(69.996,3.135) ; C23.2@70.861,3.721 70.887,3.746 v2(70.887,4.547) ; C105.2@73.403,26.26 73.503,26.361 v1(73.503,26.899)
  BOTTOM w0.254: v1(0.545,48.6) 0.564,48.581 0.863,48.581 1.24,48.203 C42.2@1.24,48.178 ; v1(16.48,27.737) 16.486,27.742 16.486,28.367 R158.2@16.491,28.373 ; v1(21.345,36.8) 22.063,36.8 C138.2@22.078,36.786 ; C36.2@32.857,38.61 v1(32.857,38.935) ; C34.2@34.778,38.61 34.92,38.751 35.059,38.751 v2(35.107,38.8) ; C32.2@36.739,38.61 36.881,38.751 37.043,38.751 v2(37.092,38.8) ; v2(37.145,52.419) 37.193,52.467 37.311,52.467 37.752,52.909 C44.2@37.752,52.934 ; v1@38.153,46.292 38.169,46.308 38.615,46.308 C80.2@38.721,46.414 ; C26.2@38.723,38.61 38.745,38.631 v2(38.745,38.8) ; C134.1@39.267,28.5 39.284,28.483 C127.2@39.284,27.57 ; C30.2@40.968,38.61 40.99,38.632 41.515,38.632 v2(41.537,38.654) ; R68.2@47.935,23.537 47.979,23.581 48.353,23.581 v1@48.392,23.619 ; R70.2@48.294,24.528 48.294,23.679 48.345,23.627 v1(48.345,23.6) ; C79.2@48.375,41.859 v1(49.195,41.859) ; v1@48.438,23.631 v1(49.076,23.631) 49.095,23.65 49.295,23.65 C60.2@49.345,23.7 ; C74.2@48.945,39 v1(49.745,39) ; C11.2@51.075,52.776 51.148,52.849 51.148,53.083 51.277,53.212 v2(51.277,53.281) ; C2.2@51.114,50.32 C2.2@51.145,50.35 v2(51.145,50.8) ; v2(51.145,24.4) 51.834,24.4 C58.2@51.914,24.481 ; R4.2@57.084,32.356 57.345,32.617 v2(57.345,33) ; v2(57.552,48.514) R13.1@58.352,48.514 ; C13.2@60.548,43.779 60.555,43.787 60.969,43.787 v1(60.977,43.795) ; v2(60.675,51.39) 60.675,51.321 60.882,51.114 60.882,50.664 C7.2@60.955,50.591
  BOTTOM w0.3: v1(39.515,32.44) 41.134,32.44 41.497,32.44 41.526,32.411 41.965,32.411 ; C128.2@41.06,31.894 41.065,31.894 41.115,31.844 C114.2@41.115,31.254 ; C114.2@41.115,31.149 C114.2@41.06,31.093 41.085,31.093 41.135,31.043 41.135,30.985 41.227,30.893 41.227,30.443 41.137,30.354 41.137,30.096 41.115,30.074 v1(41.115,28.44) 41.118,28.443 41.956,28.443 ; v1(42.796,28.445) 42.794,28.443 41.956,28.443 ; v1(43.522,32.411) 41.965,32.411 ; 41.956,28.443 41.914,28.484 v1(41.914,30.948) 41.914,32.36 41.965,32.411
  BOTTOM w0.305: C52.2@32.745,28.8 C52.2@32.78,28.836 ; C52.2@32.78,29.436 v1(32.78,30.273) 32.78,30.764 C56.2@32.745,30.8 32.806,30.861 v1(33.396,30.861) 34.083,30.861 C57.2@34.145,30.8 34.492,30.874 35.932,30.874 C67.2@35.98,30.947 ; C57.2@34.12,30.8 33.797,30.477 33.797,30.209 v1(33.794,30.206) 33.797,30.203 33.797,29.723 34.12,29.4 C53.2@34.145,29.4 ; C162.2@35.208,15.504 35.208,16.335 v2(35.216,16.343) ; C54.2@36.295,26.469 36.306,26.458 36.306,26.05 v1(36.315,26.04) ; C114.2@41.06,31.093 41.09,31.124 C114.2@41.245,31.124 ; C114.2@41.085,31.072 v1(41.245,30.912) ; C114.2@41.085,31.093 C114.2@41.115,31.124 ; 41.134,32.44 41.278,32.296 v1(41.278,31.482) 41.269,31.472 C114.2@41.269,31.277 ; v2(42.524,12.422) 43.225,12.422 C109.2@43.269,12.378 ; U11.5@44.861,13.405 44.965,13.405 45.361,13.009 46.188,13.009 R116.2@46.269,12.928 46.272,12.925 46.272,12.334 v2(46.275,12.331) ; v2(47.345,11.4) 47.345,12.053 C110.2@47.469,12.178 ; C64.2@51.945,29.8 v2(51.945,30.6)
  BOTTOM w0.406: C92.2@35.945,22.05 35.945,22.031 35.989,21.987 36.636,21.987 36.705,22.055 C93.2@36.705,22.074
  BOTTOM w0.508: v1(15.945,55.146) 16.571,55.146 Q4.2@16.68,55.255 ; R167.2@34.94,16.977 35.163,17.2 v2(35.745,17.2) ; C48.2@37.643,58.101 37.858,57.887 v2(37.858,57.472) ; C14.1@53.829,46.061 53.891,46 v2(54.545,46) ; R55.2@70.823,46.08 70.83,46.073 v1(71.406,46.073) ; R56.2@70.823,49 v1(71.345,49)
  other v1: 10.966,19.693 11.972,19.715 74.305,20.662 10.889,20.796 11.955,20.818 19.436,21.858 20.553,21.858 58.073,22.418 20.553,22.975 11.806,23.647 43.503,23.64 10.245,24.059 22.145,34.2 22.545,35 48.315,35.64 45.139,36.466 11.545,39.2 11.545,40 11.545,41.4 11.545,42.4 16.145,47.8 16.745,47.8 15.945,50 16.745,50.4 15.945,51 5.874,51.979 16.545,52.2
  other v2: 32.482,1.118 33.244,1.118 34.158,1.118 34.997,1.118 30.041,1.146 30.767,1.146 31.601,1.146 36.013,1.146 36.894,1.146 6.545,1.2 8.745,1.2 10.745,1.2 13.145,1.2 15.145,1.2 17.345,1.2 21.745,1.6 23.745,1.6 25.745,1.6 27.745,1.6 39.745,1.6 58.161,2.032 49.652,2.591 14.145,3 16.145,3 18.745,3 24.745,3.6 66.206,3.69 69.922,4.14 51.964,4.521 50.357,5.944 14.937,6.831 18.776,7.35 17.745,8.2 19.665,8.561 32.864,10.048 33.753,10.048 34.642,10.048 44.255,10.119 23.915,10.262 37.945,10.4 29.495,10.665 44.262,10.717 32.864,10.937 33.753,10.937 34.642,10.937 23.897,11.021 20.945,11.2 42.745,11.4 43.931,11.399 44.945,11.4 45.945,11.4 22.345,11.8 23.145,11.8 23.945,11.8 32.864,11.826 33.753,11.826 34.642,11.826 38.745,12 28.545,12.2 23.745,13.6 36.115,13.922 31.145,14.8 18.745,15.6 20.745,15.6 22.745,15.6 1.745,17.6 9.745,17.6 11.745,17.6 13.745,17.6 15.745,17.6 17.745,17.6 19.745,17.6 23.745,17.6 24.077,19.776 1.745,21.6 23.936,21.79 22.871,21.806 23.275,22.36 24.391,22.649 18.145,23.2 0.91,23.52 17.257,24.89 13.506,27.178 0.91,27.28 61.921,27.686 0.884,28.524 9.532,28.721 10.421,28.721 11.31,28.721 9.532,29.61 10.421,29.61 11.31,29.61 0.884,29.693 9.532,30.499 10.421,30.499 11.31,30.499 0.91,30.709 0.884,31.775 0.884,32.868 14.832,32.893 17.103,32.949 25.43,33.077 71.014,33.63 9.999,33.669 17.09,35.585 10.745,35.6 14.745,35.6 12.137,35.636 1.745,37.6 3.745,37.6 5.745,37.6 13.745,37.6 30.729,37.922 62.832,38.221 70.856,41.817 33.706,43.71 15.947,45.923 33.701,46.025 5.956,46.123 40.386,46.83 37.511,47.396 45.766,47.428 20.745,47.6 22.745,47.6 70.745,47.6 72.745,47.6 33.752,48.819 53.132,50.444 41.372,51.333 57.185,51.331 10.745,51.6 12.745,51.6 1.745,53.6 67.745,53.6 69.745,53.6 6.745,55.6 68.745,55.6 40.101,56.421 43.861,56.515 1.745,57.6 67.745,57.6
GSRN: C63.1 R72.2 TP7.1 U3.G19 | length 29.1
  TOP w0.127: U3.G19@48.715,32.04 48.742,32.04 49.122,31.661 v1(49.149,31.661)
  TOP w0.152: v1(66.994,15.648) 66.994,15.703 67.041,15.75 67.041,15.989 C63.1@67.29,16.238
  TOP w0.254: C63.1@67.29,16.238 68.255,16.238 R72.2@68.262,16.245 68.262,15.211 TP7.1@68.297,15.176
  L03_SIG w0.114: v1(49.149,31.661) 49.149,31.649 50.945,29.853 55.198,25.6 57.892,25.6 59.21,25.6 66.994,17.816 v1(66.994,15.648)
I2C_CON_SCL: J7.14 R53.1 U3.G15 | length 30
  TOP w0.152: J7.14@56.973,7.035 56.973,9.142 R53.1@57.236,9.405 ; v1(57.099,11.464) 57.099,9.53 R53.1@57.222,9.407
  TOP w0.203: U3.G15@45.515,32.04 v1(45.915,31.64)
  L03_SIG w0.114: v1(45.915,31.64) 45.915,31.129 50.945,26.1 57.017,20.027 57.017,11.611 57.099,11.529 v1(57.099,11.464)
I2C_CON_SDA: J7.13 R54.1 U3.G14 | length 30.1
  TOP w0.152: v1(56.44,11.456) 56.44,9.645 R54.1@56.195,9.4 56.443,9.151 56.443,9.086 56.467,9.062 56.467,7.041 J7.13@56.473,7.035
  TOP w0.203: U3.G14@44.716,32.04 v1(45.116,31.64)
  L03_SIG w0.114: v1(45.116,31.64) 45.116,31.283 50.945,25.454 56.493,19.905 56.493,11.644 56.486,11.637 56.486,11.503 v1(56.44,11.456)
IMU_CS: IC1.12 U3.R8 | length 9.5
  TOP w0.203: v1(39.515,25.24) U3.R8@39.915,25.64
  BOTTOM w0.114: IC1.12@31.545,23.6 32.507,23.6 32.912,24.005 34.539,25.632 39.124,25.632 v1(39.515,25.24)
IMU_INT1: IC1.4 R57.2 U3.Y7 | length 11.4
  TOP w0.203: U3.Y7@39.145,21.6 39.145,21.584 39.656,21.073 v1(39.656,21.046)
  L03_SIG w0.114: v1(30.545,21.153) 30.61,21.153 30.716,21.046 32.745,21.046 v1(39.656,21.046)
  BOTTOM w0.114: R57.2@29.895,21.1 29.947,21.153 v1(30.545,21.153)
  BOTTOM w0.152: R57.2@29.895,21.1 IC1.4@29.895,21.95
IMU_MISO: IC1.1 U3.T8 | length 10.2
  TOP w0.114: v1(39.505,23.601) 39.505,24.429 U3.T8@39.915,24.84
  BOTTOM w0.114: IC1.1@31.395,21.95 31.395,22.003 32.745,22.003 33.627,22.003 33.653,22.028 33.715,22.028 34.932,23.245 39.148,23.245 v1(39.505,23.601)
IMU_MOSI: IC1.14 U3.P7 | length 13.1
  TOP w0.114: U3.P7@39.115,26.44 39.115,26.435 39.545,26.005 v1(39.545,26)
  BOTTOM w0.114: IC1.14@31.545,22.6 32.745,22.6 33.535,22.6 34.974,24.038 39.2,24.038 40.718,25.557 40.718,26.138 40.495,26.362 39.841,26.362 39.545,26.065 v1(39.545,26)
IMU_SCLK: IC1.13 U3.P8 | length 10.9
  TOP w0.203: U3.P8@39.915,26.44 39.915,26.42 40.331,26.004 v1(40.331,25.984)
  BOTTOM w0.114: IC1.13@31.545,23.1 33.245,23.1 34.99,24.846 39.633,24.846 40.345,25.557 40.345,25.97 v1(40.331,25.984)
INITN: D17.1 J20.6 R76.2 TP10.1 U3.D11 | length 63.4
  TOP w0.152: J20.6@31.75,45.618 31.775,45.593 v1(33.193,45.593) ; v1(51.036,38.37) 51.089,38.37 51.227,38.232 61.091,38.232 63.345,35.979 63.345,30.6 64.056,29.889 R76.2@64.883,29.889 64.883,29.226 66.309,27.8 71.794,27.8 D17.1@71.908,27.915
  TOP w0.203: U3.D11@42.315,34.44 v1(42.715,34.84)
  TOP w0.381: TP10.1@29.633,45.717 29.732,45.618 J20.6@31.75,45.618
  L03_SIG w0.114: v1(33.193,45.593) 33.724,45.062 38.795,45.062 43.937,39.92 43.937,38.4 43.937,35.55 43.665,35.278 43.154,35.278 v1(42.715,34.84)
  BOTTOM w0.152: v1(42.715,34.84) 43.11,34.445 47.99,34.445 48.004,34.459 49.273,34.459 49.534,34.72 49.534,34.998 49.821,35.284 49.829,35.284 51.036,36.492 v1(51.036,38.37)
LED0: D3.1 U3.E17 | length 31.3
  TOP w0.152: v1(70.762,40.818) D3.1@71.908,40.818
  TOP w0.203: U3.E17@47.115,33.64 v1(47.515,34.04)
  L06_SIG w0.114: v1(47.515,34.04) 49.987,34.04 50.945,34.998 51.547,35.6 60.145,35.6 60.745,35 69.345,35 71.319,36.974 71.319,40.262 v1(70.762,40.818)
LED1: D4.1 U3.F13 | length 33
  TOP w0.152: v1(70.762,38.232) D4.1@71.908,38.232
  TOP w0.203: U3.F13@43.915,32.84 v1(44.315,32.44)
  L06_SIG w0.114: v1(44.315,32.44) 44.315,33.119 44.748,33.551 44.748,35.561 45.265,36.078 50.945,36.078 60.657,36.078 61.018,35.717 69.041,35.717 70.858,37.535 70.858,38.071 70.762,38.167 v1(70.762,38.232)
LED2: D5.1 U3.G13 | length 31.7
  TOP w0.152: v1(70.745,34.2) 70.783,34.239 70.783,34.522 D5.1@71.908,35.646
  TOP w0.203: U3.G13@43.915,32.04 v1(44.315,31.64)
  L06_SIG w0.114: v1(44.315,31.64) 44.777,32.101 44.777,32.577 45.371,33.171 50.945,33.171 52.374,33.171 54.145,31.4 67.945,31.4 v1(70.745,34.2)
LED3: D6.1 U3.F14 | length 30
  TOP w0.152: v1(70.762,33.061) D6.1@71.908,33.061
  TOP w0.203: U3.F14@44.716,32.84 44.716,32.834 45.14,32.41 v1(45.14,32.404)
  L06_SIG w0.114: v1(45.14,32.404) 45.14,32.462 45.48,32.802 50.945,32.802 51.568,32.802 54.354,30.015 67.72,30.015 v1@70.762,33.058
MCSNO: J20.3 U3.E16 | length 21.6
  TOP w0.114: J20.3@35.45,44.348 36.796,44.348 36.948,44.196 v1(36.982,44.196)
  TOP w0.203: U3.E16@46.315,33.64 v1(46.715,34.04)
  L03_SIG w0.114: v1(36.982,44.196) 37.281,43.898 37.281,42.736 36.628,42.084 36.628,38.4 39.077,35.951 39.077,34.766 40.242,33.602 43.665,33.602 44.019,33.249 45.924,33.249 v1(46.715,34.04)
NetC25_1: C25.1 C26.1 L4.1 U3.C7 | length 5.9
  TOP w0.203: v1(38.715,34.852) U3.C7@39.115,35.252
  L04_PWR w0.381: v1(37.808,38.108) 38.16,37.757 38.16,35.407 v1(38.715,34.852)
  BOTTOM w0.203: C26.1@37.823,38.61 37.808,38.595 37.808,38.145 37.845,38.108 v1@37.838,38.1 ; C25.1@38.671,35.123 38.671,35.098 38.77,35 C25.1@38.795,35
  BOTTOM w0.508: v1@37.808,38.125 v1@37.808,38.145 ; C26.1@37.816,38.611 L4.1@37.816,39.53
NetC27_1: C27.1 C28.1 L5.1 U3.D2 | length 0.5
  TOP w0.203: v1(34.785,34.803) 34.785,34.787 35.115,34.456 U3.D2@35.115,34.44
NetC29_1: C29.1 C30.1 L6.1 U3.C9 | length 5.2
  TOP w0.203: v1(40.315,35.64) U3.C9@40.716,35.24
  L04_PWR w0.381: v1(40.053,38.108) 40.436,38.108 40.86,37.685 40.86,36.184 v1(40.315,35.64)
  BOTTOM w0.508: v1@40.053,38.125 C30.1@40.053,38.595 ; C30.1@40.062,38.611 L6.1@40.062,39.53
NetC31_1: C31.1 C32.1 L8.1 U3.C5 | length 6.9
  TOP w0.203: v1(37.115,34.84) U3.C5@37.515,35.24
  L04_PWR w0.381: v1(35.733,38.166) 35.783,38.217 36.528,38.217 37.649,37.096 37.649,35.373 v1(37.115,34.84)
  BOTTOM w0.508: v1(35.733,38.166) 35.768,38.202 35.768,38.4 35.768,38.539 C32.1@35.839,38.61 ; C32.1@35.835,38.611 L8.1@35.835,39.53
NetC33_1: C33.1 C34.1 L7.1 U3.B5 | length 7
  TOP w0.203: v1(37.115,35.64) U3.B5@37.515,36.04
  L04_PWR w0.381: v1(33.878,38.071) 33.992,38.185 34.76,38.185 35.229,37.716 35.229,36.716 36.305,35.64 v1(37.115,35.64)
  BOTTOM w0.508: v1(33.878,38.071) 33.878,38.4 C34.1@33.878,38.61 33.888,38.619 33.888,39.522 L7.1@33.879,39.53
NetC35_1: C35.1 C36.1 L9.1 U3.C4 | length 9.6
  TOP w0.203: v1(36.315,34.84) U3.C4@36.716,35.24
  L04_PWR w0.381: v1(31.773,38.057) 32.487,38.057 32.745,37.8 32.912,37.633 32.912,35.591 33.406,35.097 33.79,35.097 34.58,34.308 35.783,34.308 v1(36.315,34.84)
  BOTTOM w0.508: v1(31.773,38.057) 31.886,38.17 31.886,38.539 C36.1@31.957,38.61 31.957,39.518 L9.1@31.945,39.53
NetC73_1: C73.1 FB1.2 J7.19 J7.20
NetC76_1: C76.1 R77.2 R80.2 | length 1.9
  TOP w0.114: R77.2@67.25,13.179 67.25,12.312 C76.1@67.261,12.301 68.189,12.301 R80.2@68.259,12.232
NetC80_1: C80.1 R92.2 U6.5 | length 2.9
  TOP w0.152: v1(40.153,46.076) 40.192,46.037 40.301,46.037 40.429,45.908 40.756,45.908 U6.5@41.18,45.485
  BOTTOM w0.152: R92.2@39.629,45.477 39.629,46.422 39.878,46.173 40,46.173 40.098,46.076 v1(40.153,46.076)
NetC124_1: C124.1 C125.2 R137.1 U3.H12 | length 3
  TOP w0.203: U3.H12@43.115,31.24 43.174,31.299 43.174,31.309 43.459,31.594 43.553,31.594 v1(43.582,31.623)
  BOTTOM w0.254: C124.1@43.038,31.714 43.11,31.642 43.562,31.642 v1(43.582,31.623) 43.582,31.596 43.644,31.533 43.644,30.839 C125.2@43.821,30.662
  BOTTOM w0.508: v1(42.815,38.206) 43.526,38.206 R137.1@43.545,38.225
NetC142_1: C142.1 D31.1 L14.2 U15.8
NetC142_2: C142.2 D29.1 U15.7
NetC143_1: C143.1 D30.1 U15.12
NetC143_2: C143.2 D32.1 L15.2 U15.11
NetC144_2: C144.2 U15.2 | length 1.5
  TOP w0.254: C144.2@10.922,32.912 11.171,32.663 U15.2@11.171,31.51
NetC145_1: C145.1 U15.17 | length 1.6
  TOP w0.254: 10.94,26.954 10.94,27.066 11.169,27.295 11.169,27.708 U15.17@11.171,27.71
  TOP w0.508: C145.1@10.642,26.283 10.94,26.581 10.94,26.954
NetC146_1: C146.1 C147.1 U15.24 | length 2.6
  TOP w0.254: U15.24@12.321,30.86 12.323,30.862 13.858,30.862 C147.1@13.864,30.868 13.867,30.865 14.883,30.865 C146.1@14.887,30.861
NetC146_2: C146.2 R157.1 | length 1
  TOP w0.254: C146.2@15.787,30.861 R157.1@15.787,31.877
NetC148_1: C148.1 C149.1 U15.19 | length 2.8
  TOP w0.254: U15.19@12.321,28.36 13.318,28.36 v2@13.603,28.36 ; C149.1@14.111,28.137 C149.1@13.913,28.335 ; v2@13.603,28.36 13.887,28.36 C149.1@13.913,28.335 ; v2@13.603,28.36 13.628,28.335 C149.1@13.913,28.335
  BOTTOM w0.254: v2(13.562,28.273) 13.61,28.225 14.023,28.225 C148.1@14.111,28.137
NetC149_2: C149.2 R159.1 | length 0.9
  TOP w0.254: R159.1@15.011,27.197 C149.2@15.011,28.137
NetC156_1: C156.1 D35.1 L16.2 U16.8
NetC156_2: C156.2 D33.1 U16.7
NetC157_1: C157.1 D34.1 U16.12
NetC157_2: C157.2 D36.1 L17.2 U16.11
NetC158_2: C158.2 U16.2 | length 1.5
  TOP w0.254: C158.2@30.451,11.438 30.7,11.688 U16.2@31.853,11.688
NetC159_1: C159.1 U16.17 | length 1.6
  TOP w0.254: U16.17@35.653,11.688 36.907,11.688 C159.1@37.145,11.45
NetC160_1: C160.1 C161.1 U16.24 | length 2.6
  TOP w0.254: U16.24@32.503,12.837 32.505,12.839 32.505,14.111 32.595,14.2 32.57,14.225 32.57,15.325 C160.1@32.545,15.35
NetC160_2: C160.2 R166.1 | length 1
  TOP w0.254: R166.1@31.545,16.05 C160.2@32.545,16.05
NetC162_1: C162.1 C163.1 U16.19 | length 2.3
  TOP w0.254: U16.19@35.003,12.837 v2@35.003,13.842 ; v2@35.003,14.045 35.003,14.404 C163.1@35.226,14.628
  BOTTOM w0.254: v2(35.027,14.045) 35.208,14.227 C162.1@35.208,14.604
NetC163_2: C163.2 R168.1 | length 0.9
  TOP w0.254: C163.2@35.226,15.528 R168.1@36.115,15.528
NetC164_2: C164.2 R164.2 R169.1 U16.1 | length 4.9
  TOP w0.254: R169.1@30.184,13.141 30.184,13.116 31.114,12.187 U16.1@31.853,12.187
  TOP w0.508: C164.2@29.834,15.783 29.963,15.654 29.963,14.785 R164.2@30.184,14.564 R169.1@30.184,13.141
NetC167_1: C167.1 R165.2 R170.1 U16.18 | length 5
  TOP w0.254: U16.18@35.653,12.187 36.557,12.187 36.591,12.221
  TOP w0.508: 36.308,12.221 36.591,12.221 37.145,12.775 R170.1@37.145,12.8 R165.2@37.144,14.2 37.365,14.421 37.365,14.871 C167.1@37.894,15.4
NetD1_2: D1.2 R14.1 | length 1.5
  TOP w0.254: D1.2@34.692,55.864 34.951,55.605 R14.1@36.089,55.605
NetD3_2: D3.2 R174.1 | length 1.4
  TOP w0.254: D3.2@73.559,40.818 73.796,40.581 R174.1@73.796,39.522
NetD4_2: D4.2 R175.1 | length 1.3
  TOP w0.254: D4.2@73.559,38.232 73.796,37.995 R175.1@73.796,36.982
NetD5_2: D5.2 R176.1 | length 1.4
  TOP w0.254: D5.2@73.559,35.646 73.796,35.41 R176.1@73.796,34.348
NetD6_2: D6.2 R177.1 | length 1.4
  TOP w0.254: D6.2@73.486,33.061 73.796,32.75 R177.1@73.796,31.8
NetD17_2: D17.2 R79.1 | length 1.4
  TOP w0.254: D17.2@73.465,27.915 73.796,28.246 R79.1@73.796,29.184
NetD18_1: D18.1 Q1.3 | length 2
  TOP w0.254: Q1.3@69.958,30.658 70.141,30.475 D18.1@71.908,30.475
NetD18_2: D18.2 R81.1 | length 9.6
  TOP w0.152: R81.1@65.912,29.9 65.912,29.298 66.61,28.6 68.745,28.6 69.964,29.82 73.47,29.82 73.559,29.909 D18.2@73.559,30.475
NetD19_2: D19.2 R113.1 | length 2
  TOP w0.254: D19.2@4.693,55.864 5.443,55.864 v2(5.466,55.887)
  BOTTOM w0.254: R113.1@5.442,57.112 5.442,55.911 v2(5.466,55.887)
NetD20_2: D20.2 R114.1 | length 1.4
  TOP w0.254: D20.2@8.026,55.864 8.286,55.605 R114.1@9.33,55.605
NetD21_2: D21.2 R115.1 | length 1.4
  TOP w0.254: D21.2@11.359,55.864 11.619,55.605 R115.1@12.688,55.605
NetD22_1: D22.1 R121.2 | length 2.1
  TOP w0.254: D22.1@14.693,57.515 14.716,57.491 15.588,57.491 16.017,57.062 16.017,56.525 R121.2@15.997,56.505
NetD23_1: D23.1 Q2.3 | length 2.3
  TOP w0.254: v1(23.957,57.315) 24.535,57.315 D23.1@24.675,57.455
  BOTTOM w0.508: v1(23.957,57.315) 24.097,57.455 Q2.3@25.392,57.455
NetD23_2: D23.2 R117.1 | length 1.4
  TOP w0.254: D23.2@24.692,55.864 24.952,55.605 R117.1@26.009,55.605
NetD24_1: D24.1 Q4.3 | length 1.3
  TOP w0.254: v1(17.008,57.41) 17.579,57.41 17.624,57.455
  BOTTOM w0.508: v1(17.008,57.41) 17.579,57.41 Q4.3@17.624,57.455
NetD24_2: D24.2 R118.1 | length 1.5
  TOP w0.254: D24.2@18.026,55.864 18.285,55.605 R118.1@19.376,55.605
NetD25_1: D25.1 Q3.3 | length 2.7
  TOP w0.254: v1(27.289,57.361) 27.871,57.361 D25.1@28.009,57.499
  TOP w0.508: D25.1@28.009,57.499 D25.1@28.025,57.515
  BOTTOM w0.508: v1(27.289,57.361) 27.417,57.489 Q3.3@29.14,57.489
NetD25_2: D25.2 R119.1 | length 1.5
  TOP w0.254: D25.2@28.025,55.864 28.285,55.605 R119.1@29.386,55.605
NetD26_1: D26.1 Q5.3 | length 1.4
  TOP w0.254: D26.1@21.485,57.461 21.485,57.455 21.632,57.308 v1(22.112,57.308)
  BOTTOM w0.508: Q5.3@21.48,57.466 21.638,57.308 v1(22.112,57.308)
NetD26_2: D26.2 R125.1 | length 1.6
  TOP w0.254: D26.2@21.359,55.864 21.618,55.605 R125.1@22.883,55.605